# Altium PCB mchf_pro_ui.PcbDoc (part 3 of 6)
Units mm, origin at the board's own origin, x right, y up, seen from the top; angles counter-clockwise.
Board outline 200.09 x 143.79 mm, 2 copper layers (Top Layer, Bottom Layer); 329 components, 335 nets, 1276 pads, 515 vias.
Unrouted connection lines stored in the file: 91.
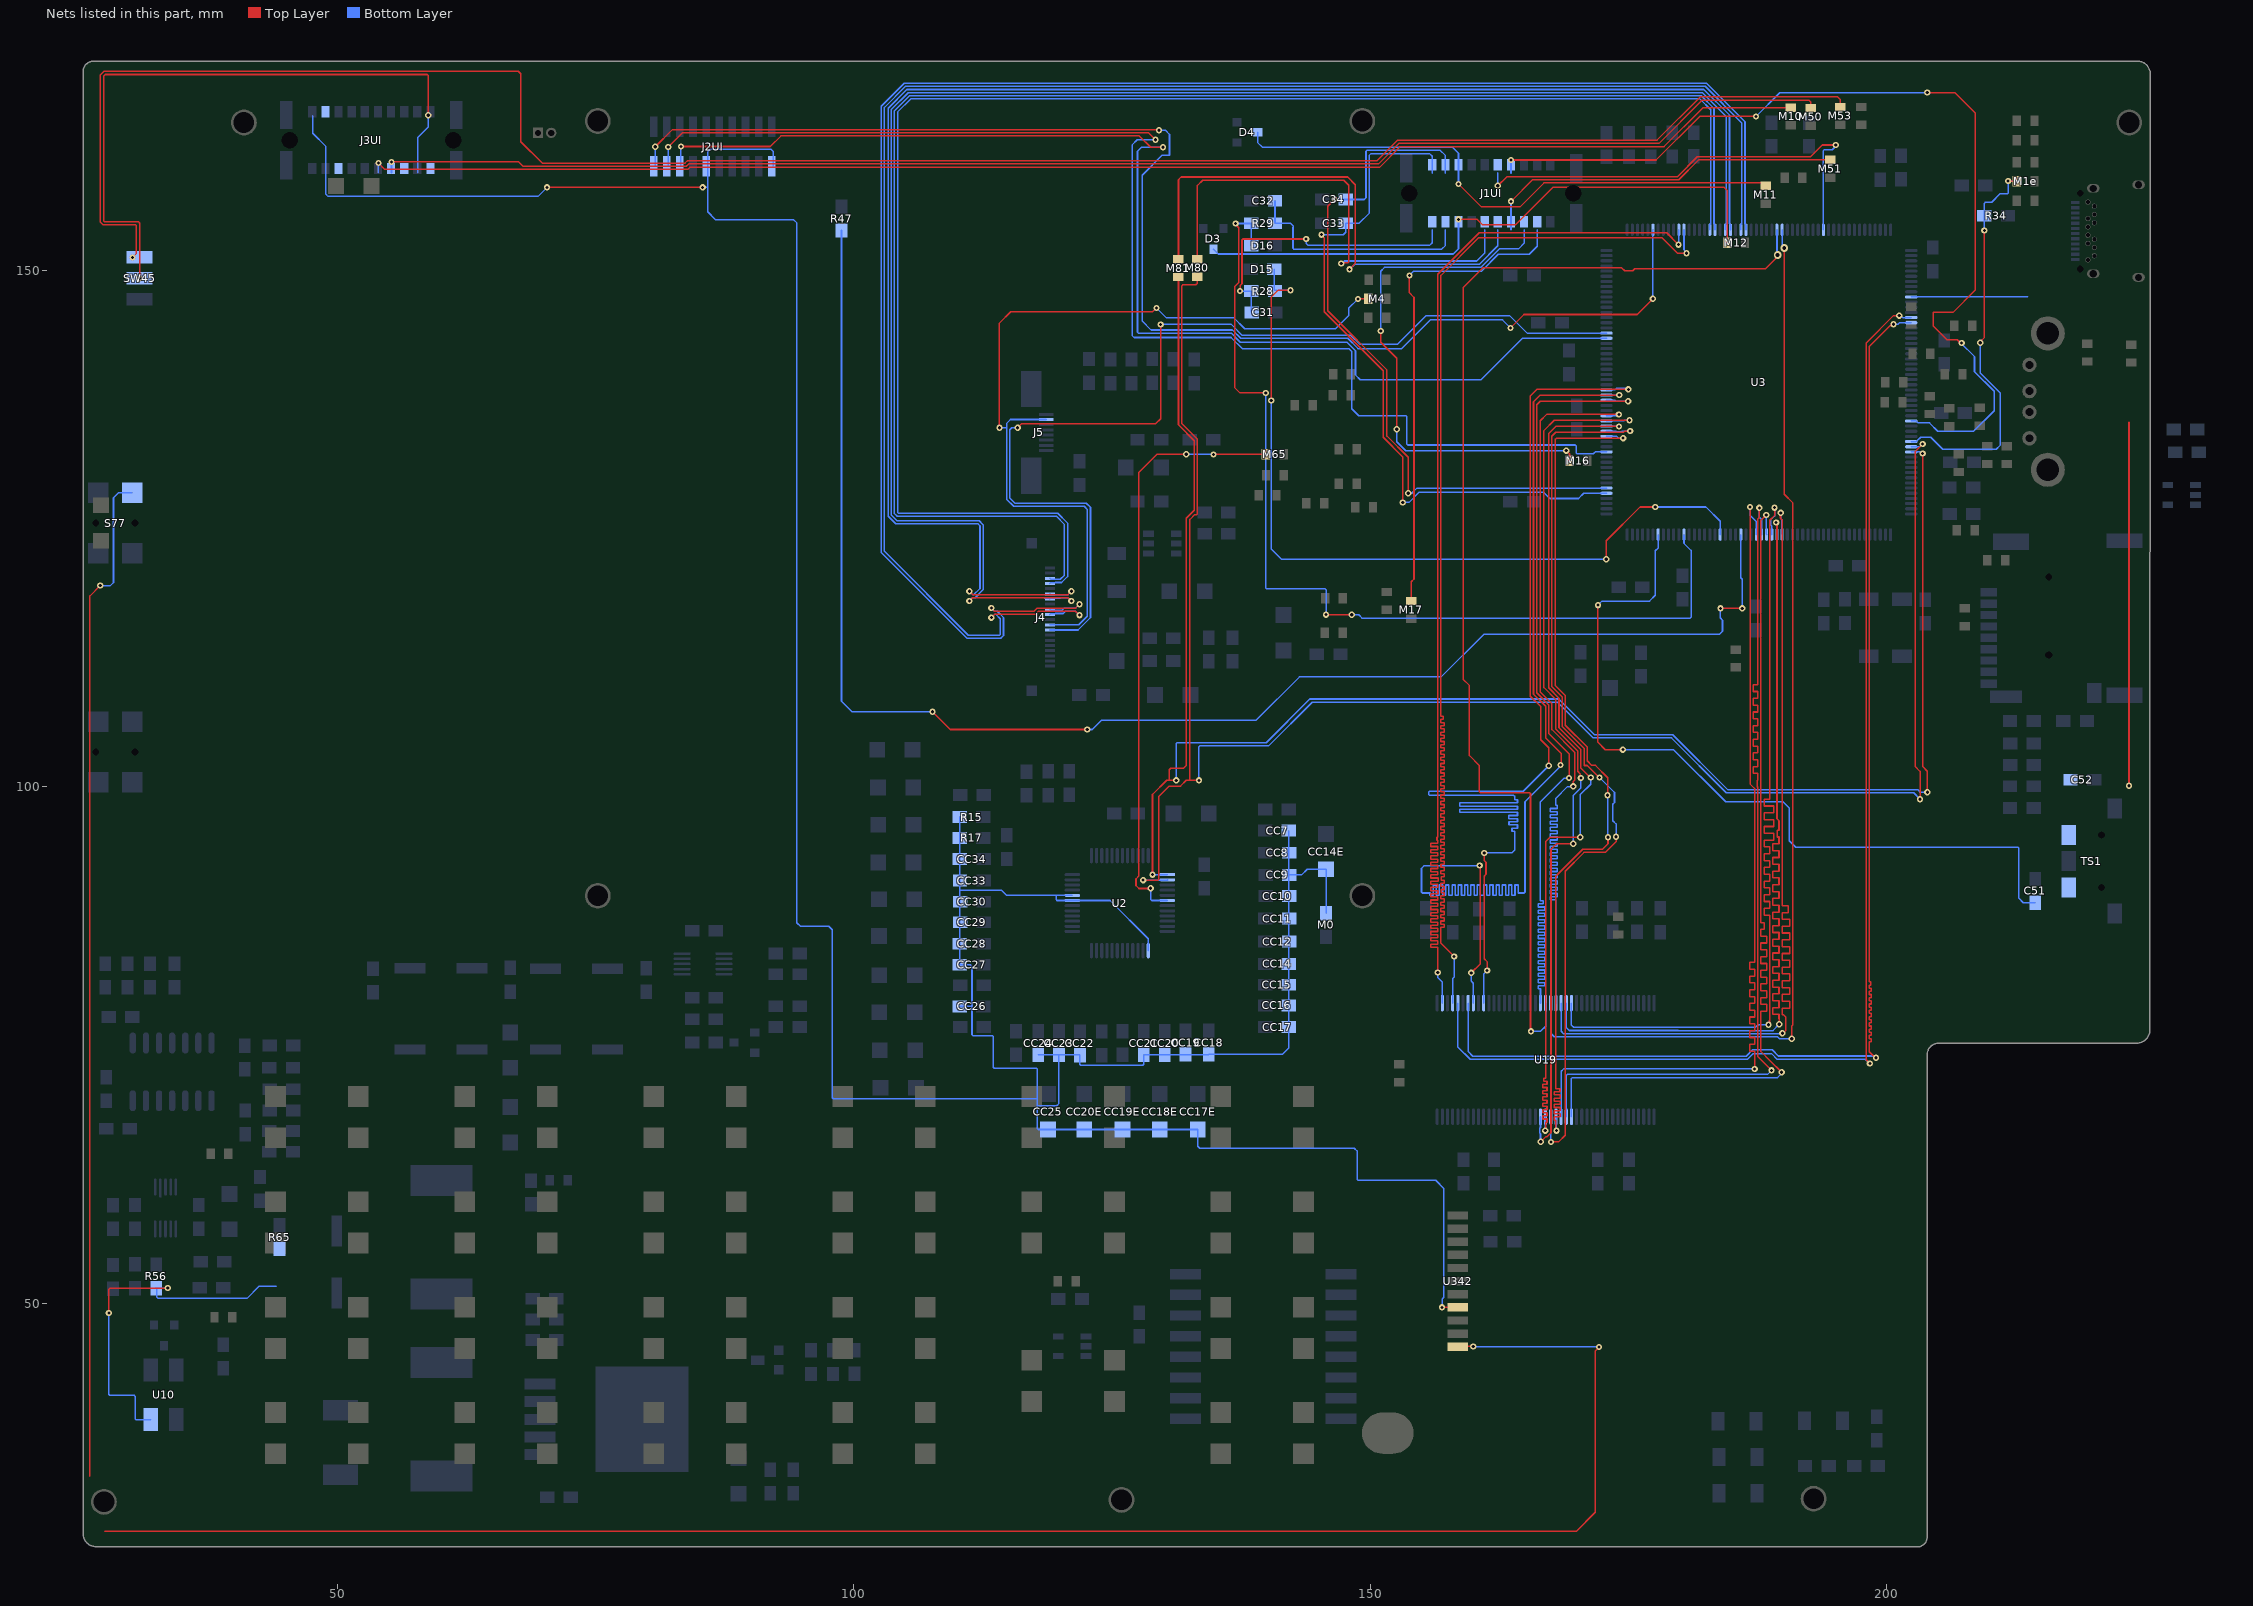
[diagram p2: the nets of this part, all layers, seen from the top]

## Via types
v1: diameter 0.61, hole 0.305, Top Layer to Bottom Layer, 511 vias
v2: diameter 0.762, hole 0.381, Top Layer to Bottom Layer, 4 vias

## Nets (pads, with @x,y where several pads share a name; then routed paths per layer and width w, separated by ;. In a path a pad name is that pad's centre, name@x,y a point inside that pad or via, vN(x,y) a via of type N, cw(c..) or ccw(c..) an arc to the next point about the centre after c; other vN are vias at no path point) (continued)
FMC_D3: (continued)
  Top Layer w0.152: v1@198.774,73.858 198.292,74.34 198.292,74.937 198.292,75.013 198.292,75.318 198.47,75.318 198.47,75.623 198.292,75.623 198.292,75.927 198.47,75.927 198.47,76.232 198.292,76.232 198.292,76.537 198.47,76.537 198.47,76.842 198.292,76.842 198.292,77.147 198.47,77.147 198.47,77.451 198.292,77.451 198.292,77.756 198.47,77.756 198.47,78.061 198.292,78.061 198.292,78.366 198.47,78.366 198.47,78.671 198.292,78.671 198.292,78.975 198.47,78.975 198.47,79.28 198.292,79.28 198.292,79.585 198.47,79.585 198.47,79.89 198.292,79.89 198.292,80.195 198.47,80.195 198.47,80.499 198.292,80.499 198.292,80.804 198.429,80.804 198.429,81.109 198.292,81.109 198.292,83.734 198.292,96.54 198.292,142.628 200.305,144.642 200.366,144.642 200.499,144.774 v1(200.622,144.774)
  Bottom Layer w0.152: U19.7@159.456,79.06 159.456,74.38 159.913,73.923 186.373,73.923 186.986,74.536 188.887,74.536 189.482,73.941 198.641,73.941 ; v1(200.622,144.774) 200.627,144.779 201.067,144.779 201.202,144.914 U3.171@202.349,144.914
  other v1: 198.93,73.776
FMC_D4: U3.76 U19.8 | length 119.9
  Top Layer w0.152: v1@159.897,81.993 159.89,81.986 v1(159.754,81.986) 160.615,82.847 160.615,92.301 v1@160.516,92.4 ; v1(168.403,102.114) 168.456,102.167 168.456,103.213 166.957,104.713 166.957,107.791 165.78,108.967 165.78,137.259 166.436,137.914 v1(174.086,137.914)
  Bottom Layer w0.152: v1(159.754,81.986) 159.754,81.195 159.956,80.993 U19.8@159.956,79.06 ; v1@159.897,81.993 v1@159.928,81.962 ; v1(160.565,92.37) 155.218,92.37 154.941,92.093 154.941,89.806 155.03,89.717 155.551,89.717 155.764,89.717 155.764,89.496 156.069,89.496 156.069,90.495 156.374,90.495 156.374,89.496 156.679,89.496 156.679,90.495 156.984,90.495 156.984,89.496 157.288,89.496 157.288,90.495 157.593,90.495 157.593,89.496 157.898,89.496 157.898,90.495 158.203,90.495 158.203,89.496 158.508,89.496 158.508,90.495 158.812,90.495 158.812,89.496 159.117,89.496 159.117,90.495 159.422,90.495 159.422,89.496 159.727,89.496 159.727,90.495 160.032,90.495 160.032,89.496 160.336,89.496 160.336,90.495 160.641,90.495 160.641,89.496 160.946,89.496 160.946,90.495 161.251,90.495 161.251,89.496 161.556,89.496 161.556,90.495 161.86,90.495 161.86,89.496 162.165,89.496 162.165,90.495 162.47,90.495 162.47,89.496 162.775,89.496 162.775,90.495 163.08,90.495 163.08,89.496 163.384,89.496 163.384,90.495 163.689,90.495 163.689,89.496 163.994,89.496 163.994,90.495 164.299,90.495 164.299,89.717 164.68,89.717 164.867,89.717 164.956,89.806 164.956,98.551 168.403,101.998 v1(168.403,102.114) ; U3.76@172.849,137.914 v1(174.086,137.914)
FMC_D5: U3.77 U19.10 | length 119.7
  Top Layer w0.152: v1(161.015,93.595) 161.015,92.872 161.187,92.7 161.187,91.521 161.015,91.349 161.015,83.353 161.291,83.077 v1(161.291,82.222) ; v1(167.262,102.041) 167.262,103.77 166.473,104.559 166.473,107.764 165.476,108.76 165.476,137.826 166.119,138.47 v1(174.962,138.47)
  Bottom Layer w0.152: U19.10@160.974,79.078 U19.10@160.956,79.06 160.956,81.887 v1(161.291,82.222) ; v1(161.015,93.595) 163.677,93.595 163.956,93.873 163.956,94.22 163.956,95.696 163.702,95.696 163.702,96.001 164.231,96.001 164.231,96.306 163.411,96.306 163.411,96.611 164.231,96.611 164.231,96.916 163.4,96.916 163.4,97.22 164.231,97.22 164.231,97.525 158.644,97.525 158.644,97.83 164.231,97.83 164.231,98.135 158.644,98.135 158.644,98.44 164.231,98.44 164.231,98.744 163.956,98.744 163.956,98.821 163.956,99.073 163.867,99.162 155.72,99.162 155.631,99.251 155.631,99.482 155.72,99.571 164.018,99.571 164.456,99.571 164.624,99.571 164.792,99.571 v1(167.262,102.041) ; U3.77@172.849,138.414 173.669,138.414 173.83,138.575 174.644,138.575 174.662,138.557 174.875,138.557 v1(174.962,138.47)